# EAGLE board MRCS-RelayBreakout_array (EAGLE 7.7.0)
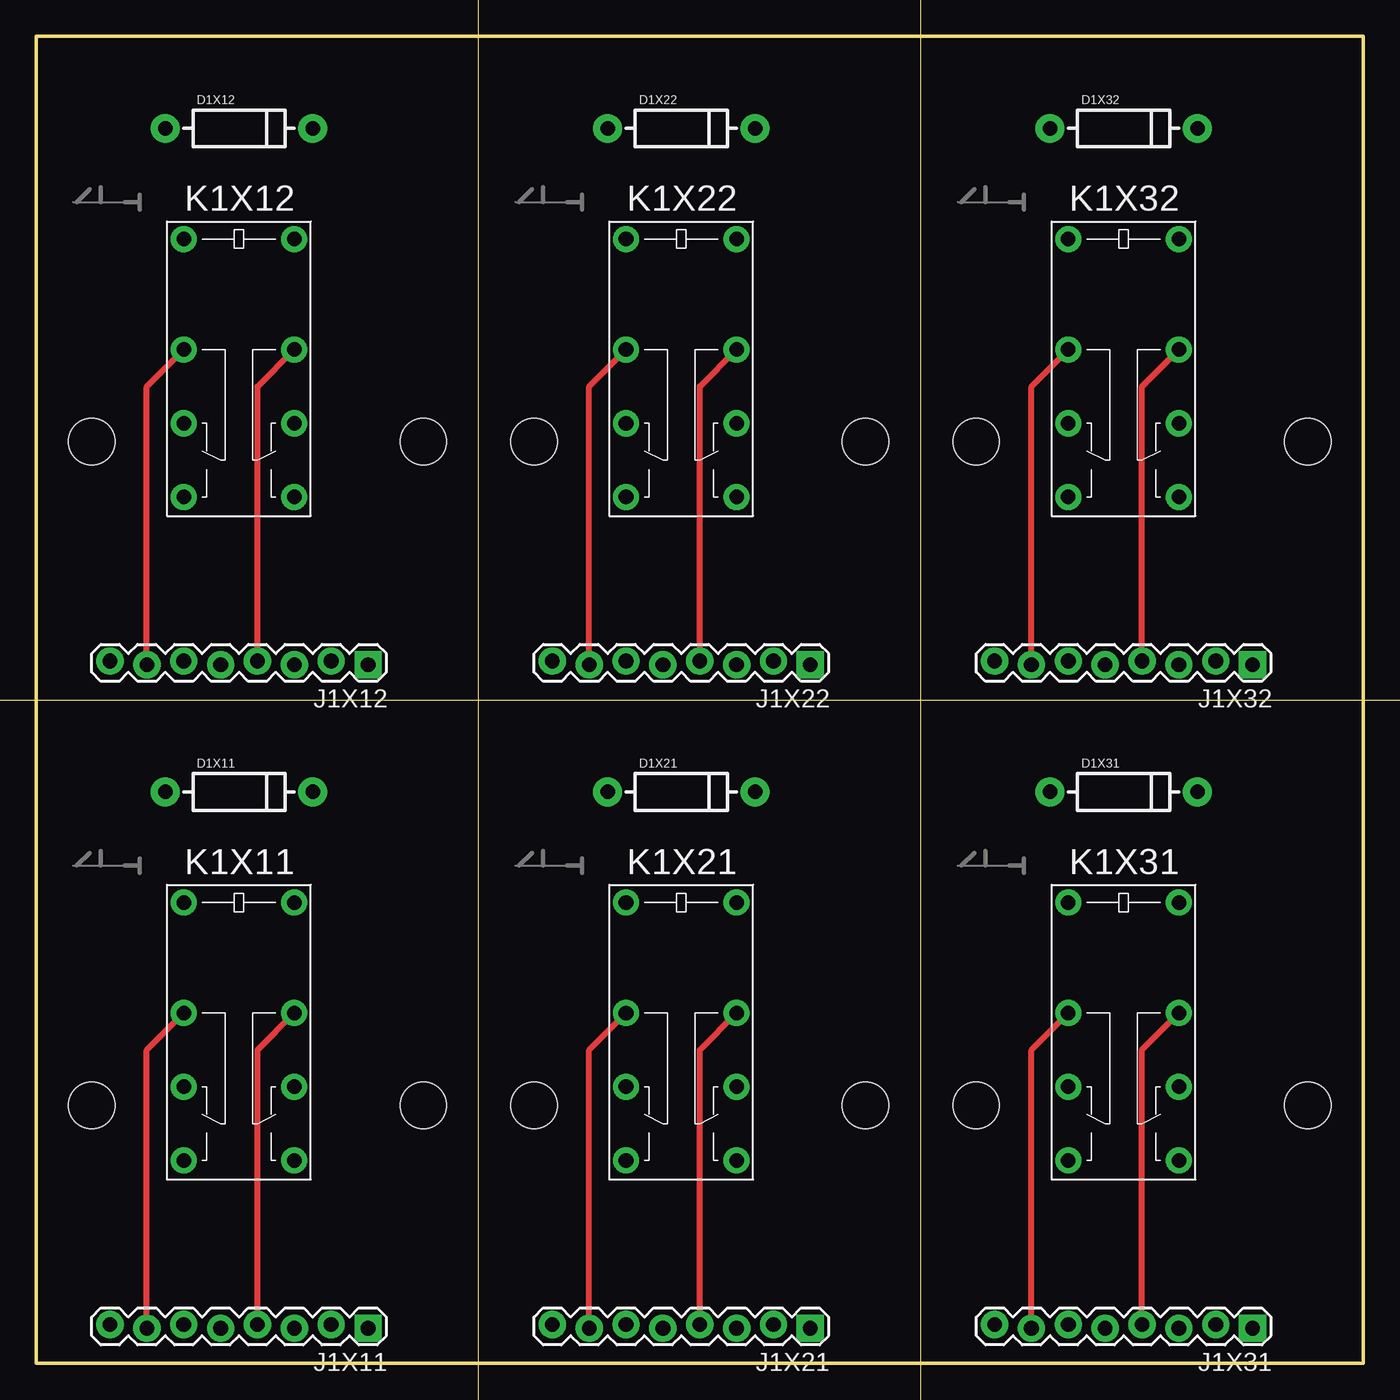
[diagram p0: board, top side]
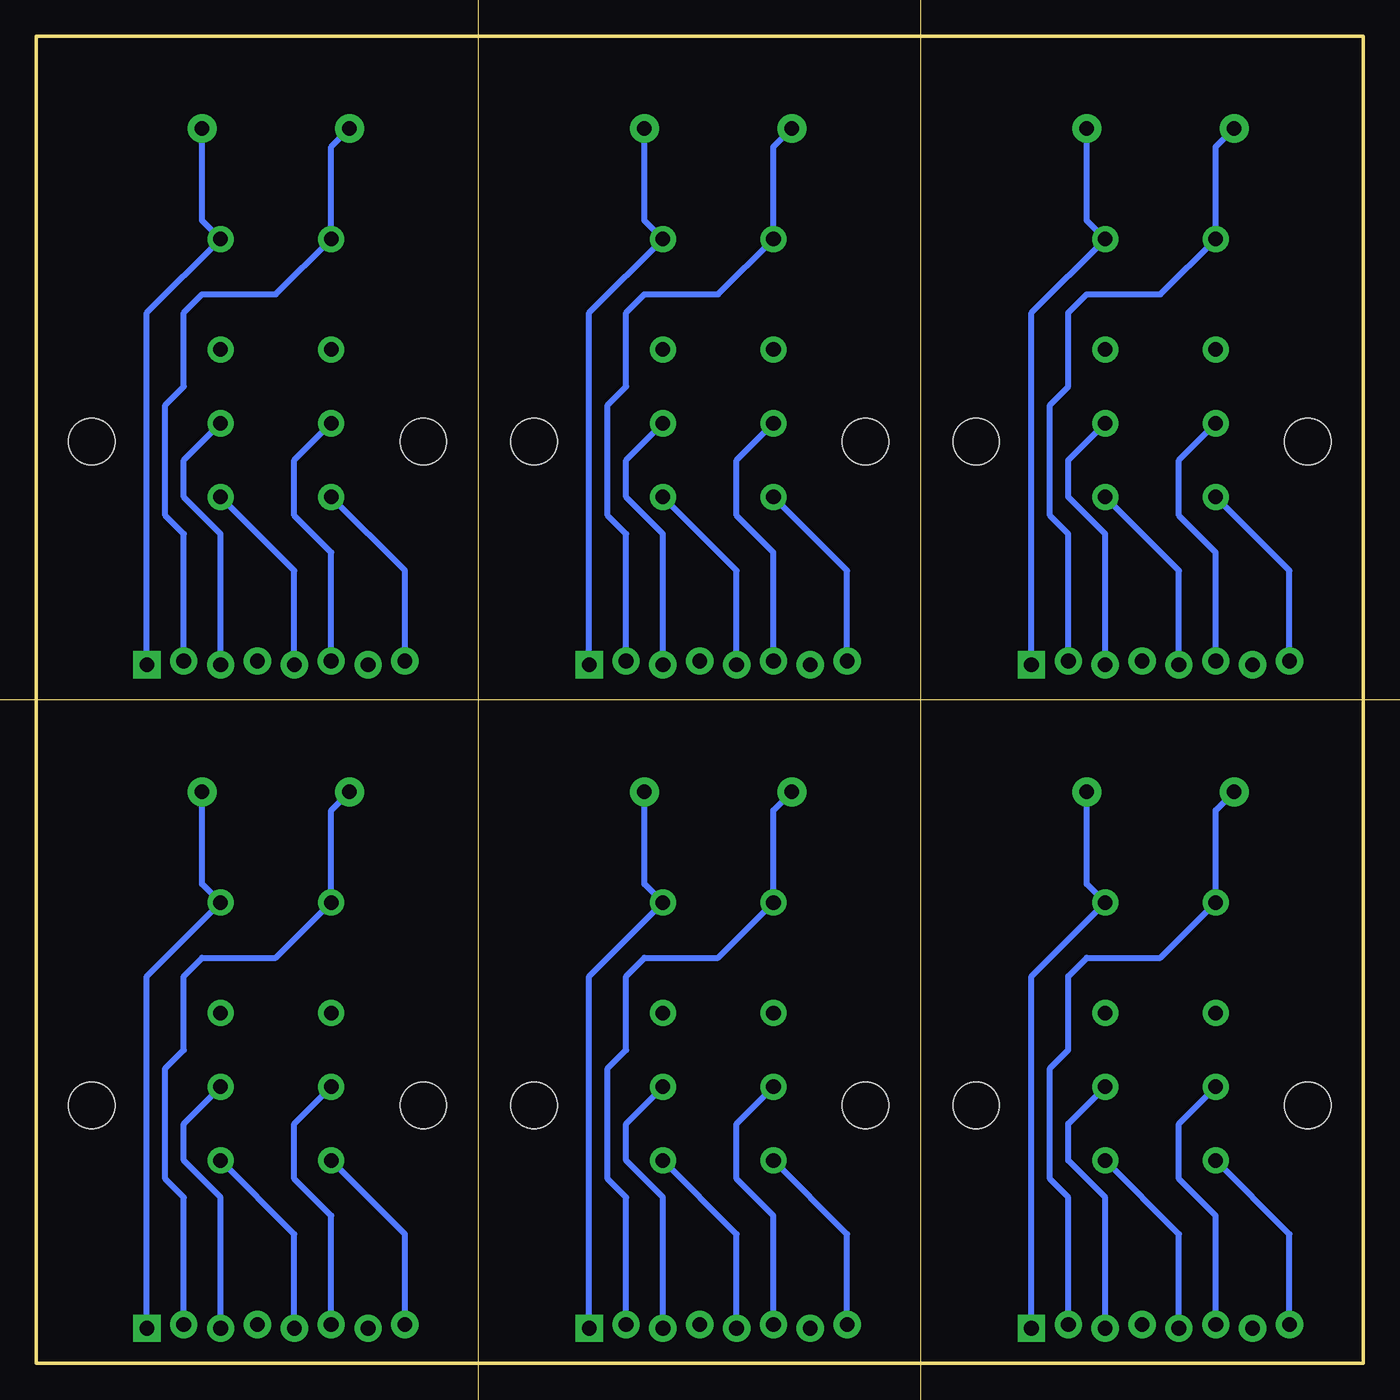
[diagram p1: board, bottom side, seen from below]

Size 91.44 x 91.44 mm. Coordinates in mm from the lower left corner, seen from the top.
Outline: 0,0 91.44,0 91.44,91.44 0,91.44 0,0
Copper layers (1*16): Top 0.035mm / dielectric 1.5mm / Bottom 0.035mm
Design rules "default": minimum track width 10mil, minimum drill 0.6mm, track to track 8mil, track to pad 8mil, pad to pad 8mil, via to via 8mil, smd to smd 8mil, copper to edge 40mil, drill to drill 8mil, minimum pad ring 10mil, minimum via ring 8mil, stop-mask expansion 4mil, vias tented up to drill 0mil, thermal gap 10mil
Holes 3.2 mm at 3.81,17.78 26.67,17.78 3.81,63.5 26.67,63.5 34.29,17.78 57.15,17.78 34.29,63.5 57.15,63.5 64.77,17.78 87.63,17.78 64.77,63.5 87.63,63.5
Milling: 3 lines

## Footprints (pad centres in the part's own frame; a part is rotated, then mirrored left to right if it is on the bottom)
DIODE-1N4001 = drill 1 pad 1.981: A 5.08,0; C -5.08,0
1X08_LOCK = drill 1.016 pad 1.88 square: 1 0,0.127 | drill 1.016 pad 1.88: 2 2.54,-0.127; 3 5.08,0.127; 4 7.62,-0.127; 5 10.16,0.127; 6 12.7,-0.127; 7 15.24,0.127; 8 17.78,-0.127
G5V-2 = drill 1 pad 1.8: 1 -8.89,-3.81; 4 -1.27,-3.81; 6 3.81,-3.81; 8 8.89,-3.81; 9 8.89,3.81; 11 3.81,3.81; 13 -1.27,3.81; 16 -8.89,3.81

## Placement (x,y rotation side)
D1X11  [DIODE-1N4001]  13.97,39.37 180 top
D1X12  [DIODE-1N4001]  13.97,85.09 180 top
D1X21  [DIODE-1N4001]  44.45,39.37 180 top
D1X22  [DIODE-1N4001]  44.45,85.09 180 top
D1X31  [DIODE-1N4001]  74.93,39.37 180 top
D1X32  [DIODE-1N4001]  74.93,85.09 180 top
J1X11  [1X08_LOCK]  22.86,2.54 180 top
J1X12  [1X08_LOCK]  22.86,48.26 180 top
J1X21  [1X08_LOCK]  53.34,2.54 180 top
J1X22  [1X08_LOCK]  53.34,48.26 180 top
J1X31  [1X08_LOCK]  83.82,2.54 180 top
J1X32  [1X08_LOCK]  83.82,48.26 180 top
K1X11  [G5V-2]  13.97,22.86 270 top
K1X12  [G5V-2]  13.97,68.58 270 top
K1X21  [G5V-2]  44.45,22.86 270 top
K1X22  [G5V-2]  44.45,68.58 270 top
K1X31  [G5V-2]  74.93,22.86 270 top
K1X32  [G5V-2]  74.93,68.58 270 top
U$1X11  [MRCSLOGOTOP]  7.62,33.02 90 top
U$1X12  [MRCSLOGOTOP]  7.62,78.74 90 top
U$1X21  [MRCSLOGOTOP]  38.1,33.02 90 top
U$1X22  [MRCSLOGOTOP]  38.1,78.74 90 top
U$1X31  [MRCSLOGOTOP]  68.58,33.02 90 top
U$1X32  [MRCSLOGOTOP]  68.58,78.74 90 top

## Library data of the parts
D1X11 D1X12 D1X21 D1X22 D1X31 D1X32 J1X11 J1X12 J1X21 J1X22 J1X31 J1X32 U$1X11 U$1X12 U$1X21 U$1X22 U$1X31 U$1X32 = SPCoast
K1X11 K1X12 K1X21 K1X22 K1X31 K1X32 = relay

## Nets
N$1X11: D1X11.C J1X11.1 K1X11.16
N$1X12: D1X12.C J1X12.1 K1X12.16
N$1X21: D1X21.C J1X21.1 K1X21.16
N$1X22: D1X22.C J1X22.1 K1X22.16
N$1X31: D1X31.C J1X31.1 K1X31.16
N$1X32: D1X32.C J1X32.1 K1X32.16
N$2X11: D1X11.A J1X11.2 K1X11.1
N$2X12: D1X12.A J1X12.2 K1X12.1
N$2X21: D1X21.A J1X21.2 K1X21.1
N$2X22: D1X22.A J1X22.2 K1X22.1
N$2X31: D1X31.A J1X31.2 K1X31.1
N$2X32: D1X32.A J1X32.2 K1X32.1
N$3X11: J1X11.3 K1X11.11
N$3X12: J1X12.3 K1X12.11
N$3X21: J1X21.3 K1X21.11
N$3X22: J1X22.3 K1X22.11
N$3X31: J1X31.3 K1X31.11
N$3X32: J1X32.3 K1X32.11
N$4X11: J1X11.4 K1X11.13
N$4X12: J1X12.4 K1X12.13
N$4X21: J1X21.4 K1X21.13
N$4X22: J1X22.4 K1X22.13
N$4X31: J1X31.4 K1X31.13
N$4X32: J1X32.4 K1X32.13
N$6X11: J1X11.5 K1X11.9
N$6X12: J1X12.5 K1X12.9
N$6X21: J1X21.5 K1X21.9
N$6X22: J1X22.5 K1X22.9
N$6X31: J1X31.5 K1X31.9
N$6X32: J1X32.5 K1X32.9
N$7X11: J1X11.6 K1X11.6
N$7X12: J1X12.6 K1X12.6
N$7X21: J1X21.6 K1X21.6
N$7X22: J1X22.6 K1X22.6
N$7X31: J1X31.6 K1X31.6
N$7X32: J1X32.6 K1X32.6
N$8X11: J1X11.7 K1X11.4
N$8X12: J1X12.7 K1X12.4
N$8X21: J1X21.7 K1X21.4
N$8X22: J1X22.7 K1X22.4
N$8X31: J1X31.7 K1X31.4
N$8X32: J1X32.7 K1X32.4
N$9X11: J1X11.8 K1X11.8
N$9X12: J1X12.8 K1X12.8
N$9X21: J1X21.8 K1X21.8
N$9X22: J1X22.8 K1X22.8
N$9X31: J1X31.8 K1X31.8
N$9X32: J1X32.8 K1X32.8

## Tracks (layer width: path | path; a pad name or v marks a point on that pad's centre or on a via)
N$1X11
  Bottom 0.406: J1X11.1 22.86,26.67 K1X11.16 19.05,33.02 D1X11.C
N$1X12
  Bottom 0.406: J1X12.1 22.86,72.39 K1X12.16 19.05,78.74 D1X12.C
N$1X21
  Bottom 0.406: J1X21.1 53.34,26.67 K1X21.16 49.53,33.02 D1X21.C
N$1X22
  Bottom 0.406: J1X22.1 53.34,72.39 K1X22.16 49.53,78.74 D1X22.C
N$1X31
  Bottom 0.406: J1X31.1 83.82,26.67 K1X31.16 80.01,33.02 D1X31.C
N$1X32
  Bottom 0.406: J1X32.1 83.82,72.39 K1X32.16 80.01,78.74 D1X32.C
N$2X11
  Bottom 0.406: D1X11.A 10.16,38.1 K1X11.1 13.97,27.94 19.05,27.94 20.32,26.67 20.32,21.59 21.59,20.32 21.59,12.7 20.32,11.43 J1X11.2
N$2X12
  Bottom 0.406: D1X12.A 10.16,83.82 K1X12.1 13.97,73.66 19.05,73.66 20.32,72.39 20.32,67.31 21.59,66.04 21.59,58.42 20.32,57.15 J1X12.2
N$2X21
  Bottom 0.406: D1X21.A 40.64,38.1 K1X21.1 44.45,27.94 49.53,27.94 50.8,26.67 50.8,21.59 52.07,20.32 52.07,12.7 50.8,11.43 J1X21.2
N$2X22
  Bottom 0.406: D1X22.A 40.64,83.82 K1X22.1 44.45,73.66 49.53,73.66 50.8,72.39 50.8,67.31 52.07,66.04 52.07,58.42 50.8,57.15 J1X22.2
N$2X31
  Bottom 0.406: D1X31.A 71.12,38.1 K1X31.1 74.93,27.94 80.01,27.94 81.28,26.67 81.28,21.59 82.55,20.32 82.55,12.7 81.28,11.43 J1X31.2
N$2X32
  Bottom 0.406: D1X32.A 71.12,83.82 K1X32.1 74.93,73.66 80.01,73.66 81.28,72.39 81.28,67.31 82.55,66.04 82.55,58.42 81.28,57.15 J1X32.2
N$3X11
  Bottom 0.406: J1X11.3 17.78,11.43 20.32,13.97 20.32,16.51 K1X11.11
N$3X12
  Bottom 0.406: J1X12.3 17.78,57.15 20.32,59.69 20.32,62.23 K1X12.11
N$3X21
  Bottom 0.406: J1X21.3 48.26,11.43 50.8,13.97 50.8,16.51 K1X21.11
N$3X22
  Bottom 0.406: J1X22.3 48.26,57.15 50.8,59.69 50.8,62.23 K1X22.11
N$3X31
  Bottom 0.406: J1X31.3 78.74,11.43 81.28,13.97 81.28,16.51 K1X31.11
N$3X32
  Bottom 0.406: J1X32.3 78.74,57.15 81.28,59.69 81.28,62.23 K1X32.11
N$4X11
  Top 0.406: J1X11.4 15.24,21.59 K1X11.13
N$4X12
  Top 0.406: J1X12.4 15.24,67.31 K1X12.13
N$4X21
  Top 0.406: J1X21.4 45.72,21.59 K1X21.13
N$4X22
  Top 0.406: J1X22.4 45.72,67.31 K1X22.13
N$4X31
  Top 0.406: J1X31.4 76.2,21.59 K1X31.13
N$4X32
  Top 0.406: J1X32.4 76.2,67.31 K1X32.13
N$6X11
  Bottom 0.406: J1X11.5 12.7,8.89 K1X11.9
N$6X12
  Bottom 0.406: J1X12.5 12.7,54.61 K1X12.9
N$6X21
  Bottom 0.406: J1X21.5 43.18,8.89 K1X21.9
N$6X22
  Bottom 0.406: J1X22.5 43.18,54.61 K1X22.9
N$6X31
  Bottom 0.406: J1X31.5 73.66,8.89 K1X31.9
N$6X32
  Bottom 0.406: J1X32.5 73.66,54.61 K1X32.9
N$7X11
  Bottom 0.406: J1X11.6 10.16,10.16 12.7,12.7 12.7,16.51 K1X11.6
N$7X12
  Bottom 0.406: J1X12.6 10.16,55.88 12.7,58.42 12.7,62.23 K1X12.6
N$7X21
  Bottom 0.406: J1X21.6 40.64,10.16 43.18,12.7 43.18,16.51 K1X21.6
N$7X22
  Bottom 0.406: J1X22.6 40.64,55.88 43.18,58.42 43.18,62.23 K1X22.6
N$7X31
  Bottom 0.406: J1X31.6 71.12,10.16 73.66,12.7 73.66,16.51 K1X31.6
N$7X32
  Bottom 0.406: J1X32.6 71.12,55.88 73.66,58.42 73.66,62.23 K1X32.6
N$8X11
  Top 0.406: J1X11.7 7.62,21.59 K1X11.4
N$8X12
  Top 0.406: J1X12.7 7.62,67.31 K1X12.4
N$8X21
  Top 0.406: J1X21.7 38.1,21.59 K1X21.4
N$8X22
  Top 0.406: J1X22.7 38.1,67.31 K1X22.4
N$8X31
  Top 0.406: J1X31.7 68.58,21.59 K1X31.4
N$8X32
  Top 0.406: J1X32.7 68.58,67.31 K1X32.4
N$9X11
  Bottom 0.406: J1X11.8 5.08,8.89 K1X11.8
N$9X12
  Bottom 0.406: J1X12.8 5.08,54.61 K1X12.8
N$9X21
  Bottom 0.406: J1X21.8 35.56,8.89 K1X21.8
N$9X22
  Bottom 0.406: J1X22.8 35.56,54.61 K1X22.8
N$9X31
  Bottom 0.406: J1X31.8 66.04,8.89 K1X31.8
N$9X32
  Bottom 0.406: J1X32.8 66.04,54.61 K1X32.8

## Text on the board
Milling: V-Score | V-Score | V-Score
tDocu: DPDT Relay / Breakout | DPDT Relay / Breakout | DPDT Relay / Breakout | NO 2 / COM 2 / NC 2 / NO 1 / COM 1 / NC 1 / V - / V+ | NO 2 / COM 2 / NC 2 / NO 1 / COM 1 / NC 1 / V - / V+ | NO 2 / COM 2 / NC 2 / NO 1 / COM 1 / NC 1 / V - / V+ | DPDT Relay / Breakout | DPDT Relay / Breakout | DPDT Relay / Breakout | NO 2 / COM 2 / NC 2 / NO 1 / COM 1 / NC 1 / V - / V+ | NO 2 / COM 2 / NC 2 / NO 1 / COM 1 / NC 1 / V - / V+ | NO 2 / COM 2 / NC 2 / NO 1 / COM 1 / NC 1 / V - / V+
_tNames: D1 | D1 | D1 | K1 | K1 | K1 | J1 | J1 | J1 | D1 | D1 | D1 | K1 | K1 | K1 | J1 | J1 | J1